# Altium PCB VESC_POWER_91mm.PcbDoc
Units mm, origin at the board's own origin, x right, y up, seen from the top; angles counter-clockwise.
Board outline 92 x 60 mm, 4 copper layers (Top Layer, Layer 1, Layer 2, Bottom Layer), stack 1.622 mm thick; 65 components, 20 nets, 166 pads, 1340 vias.
Unrouted connection lines stored in the file: 69.
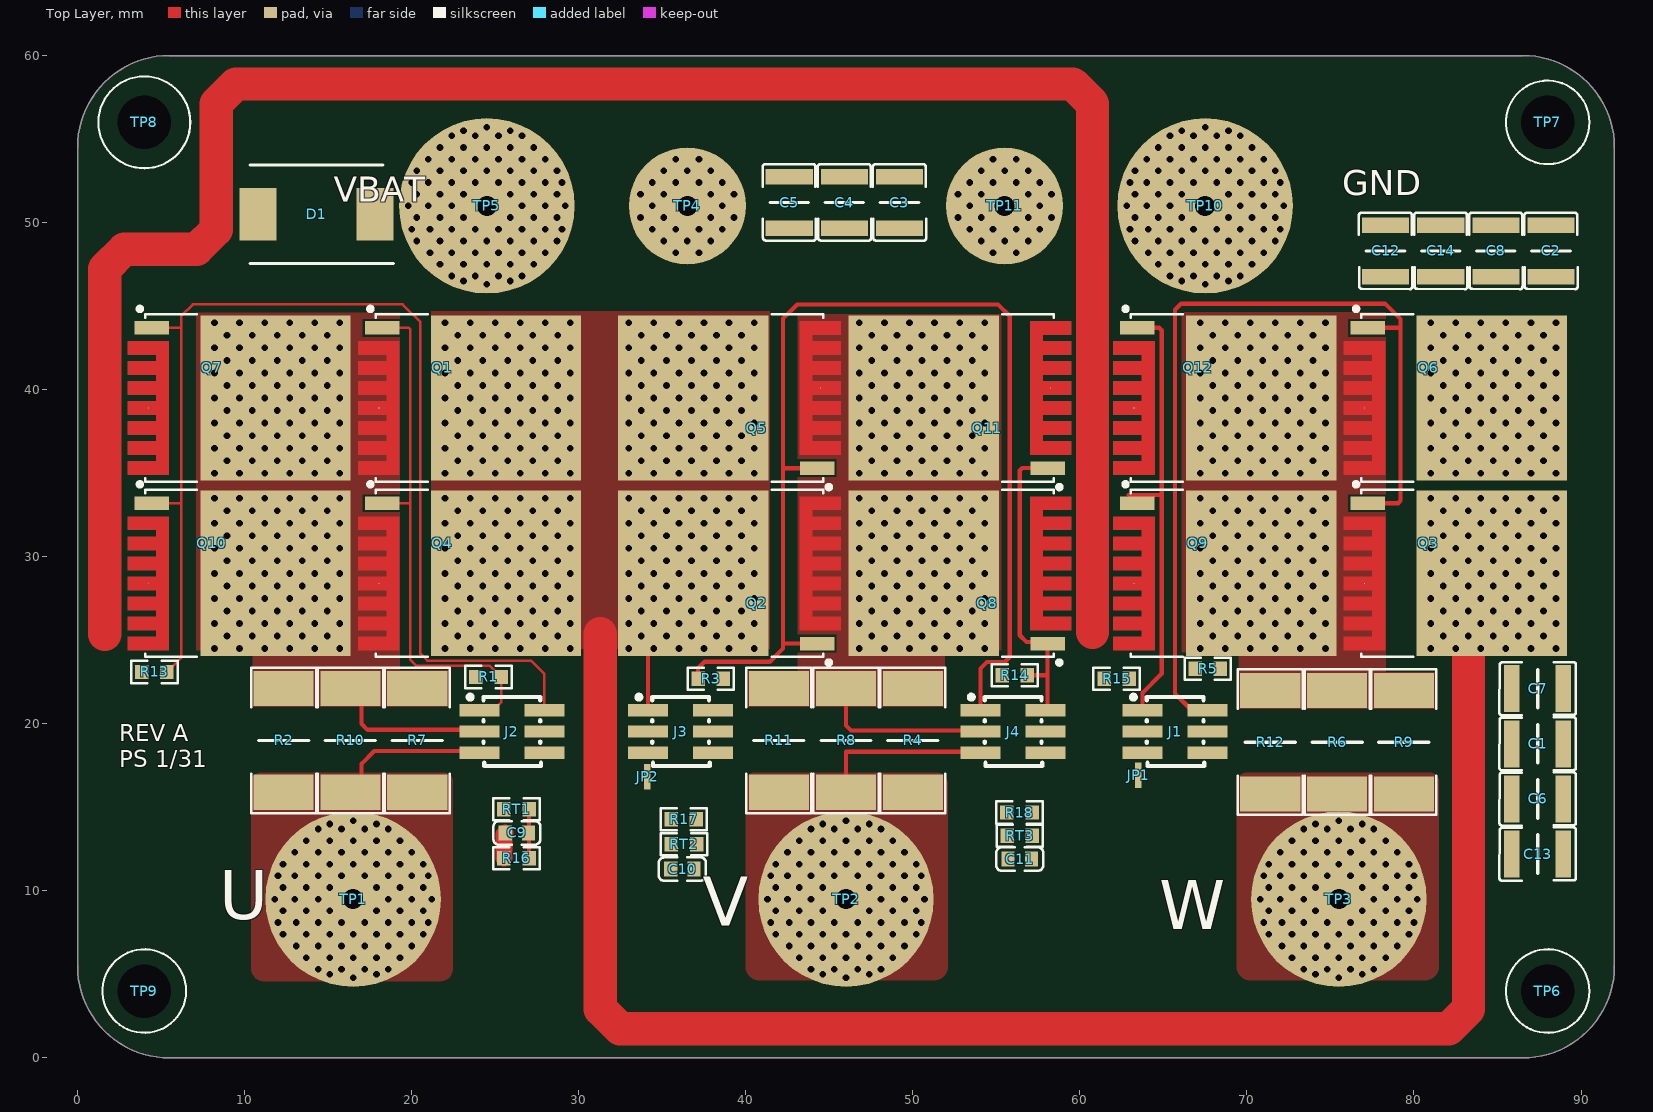
[diagram p0: Top Layer view]
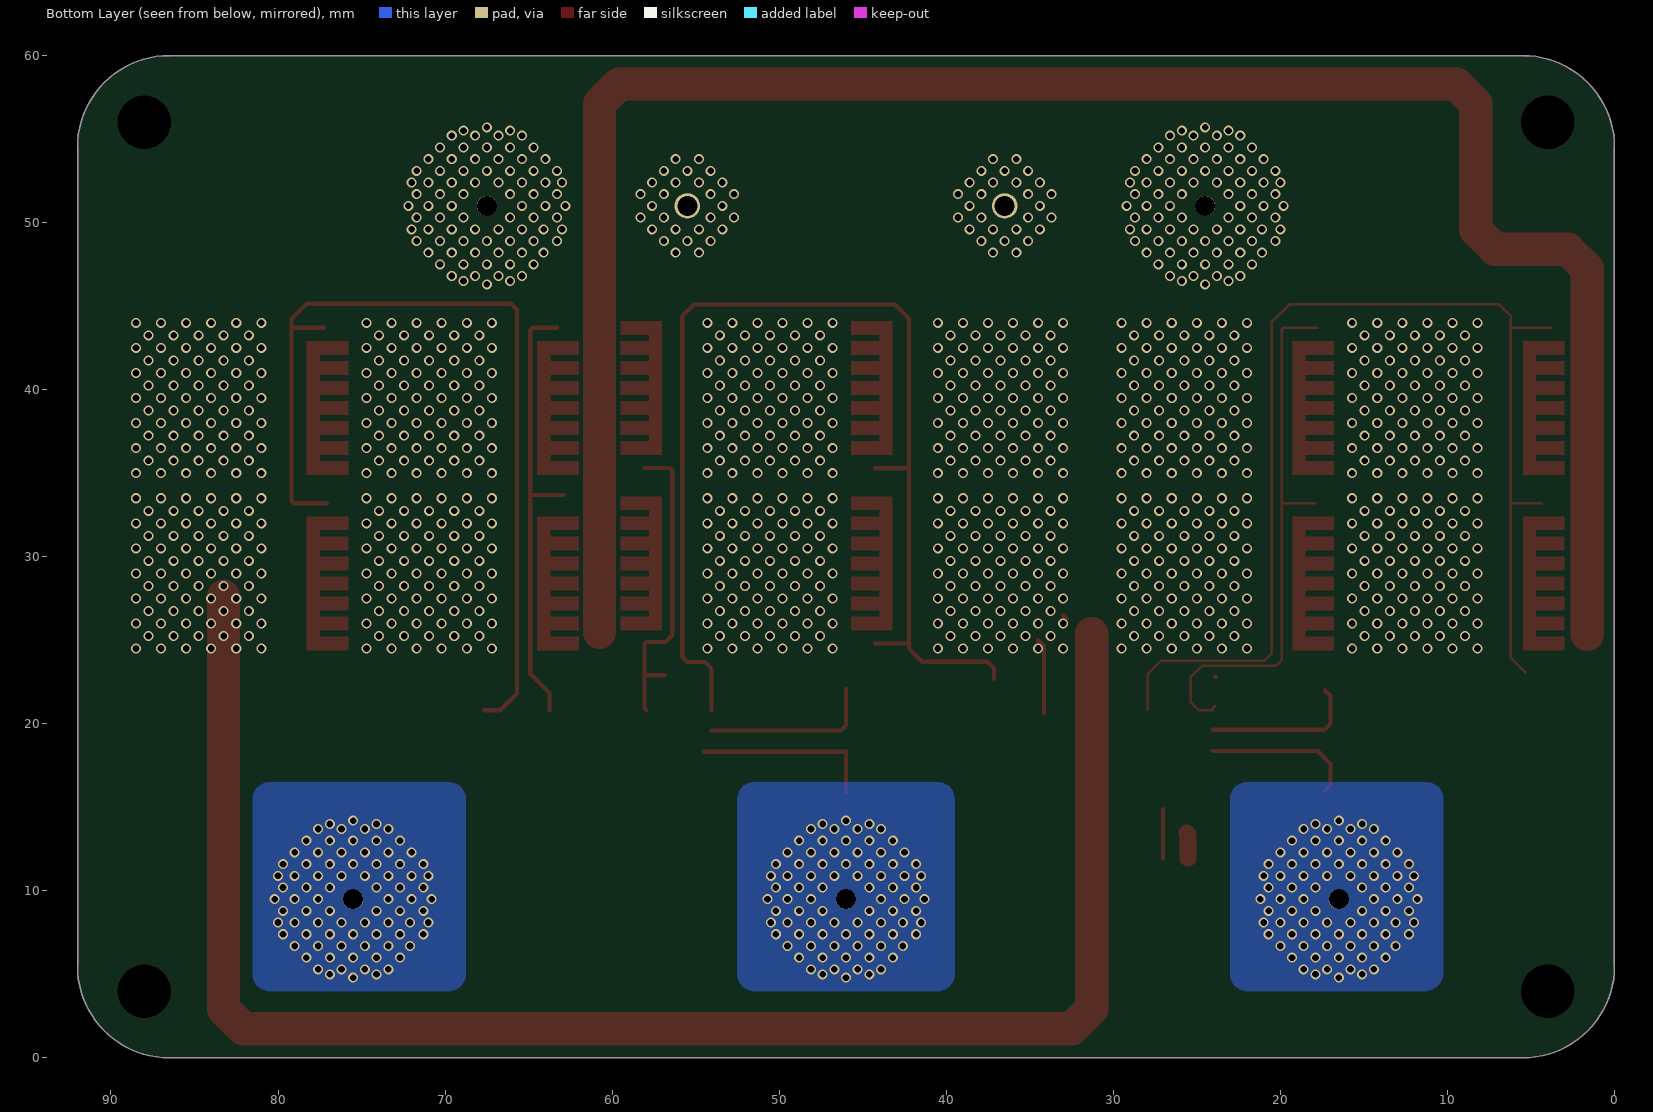
[diagram p1: Bottom Layer view, seen from below]
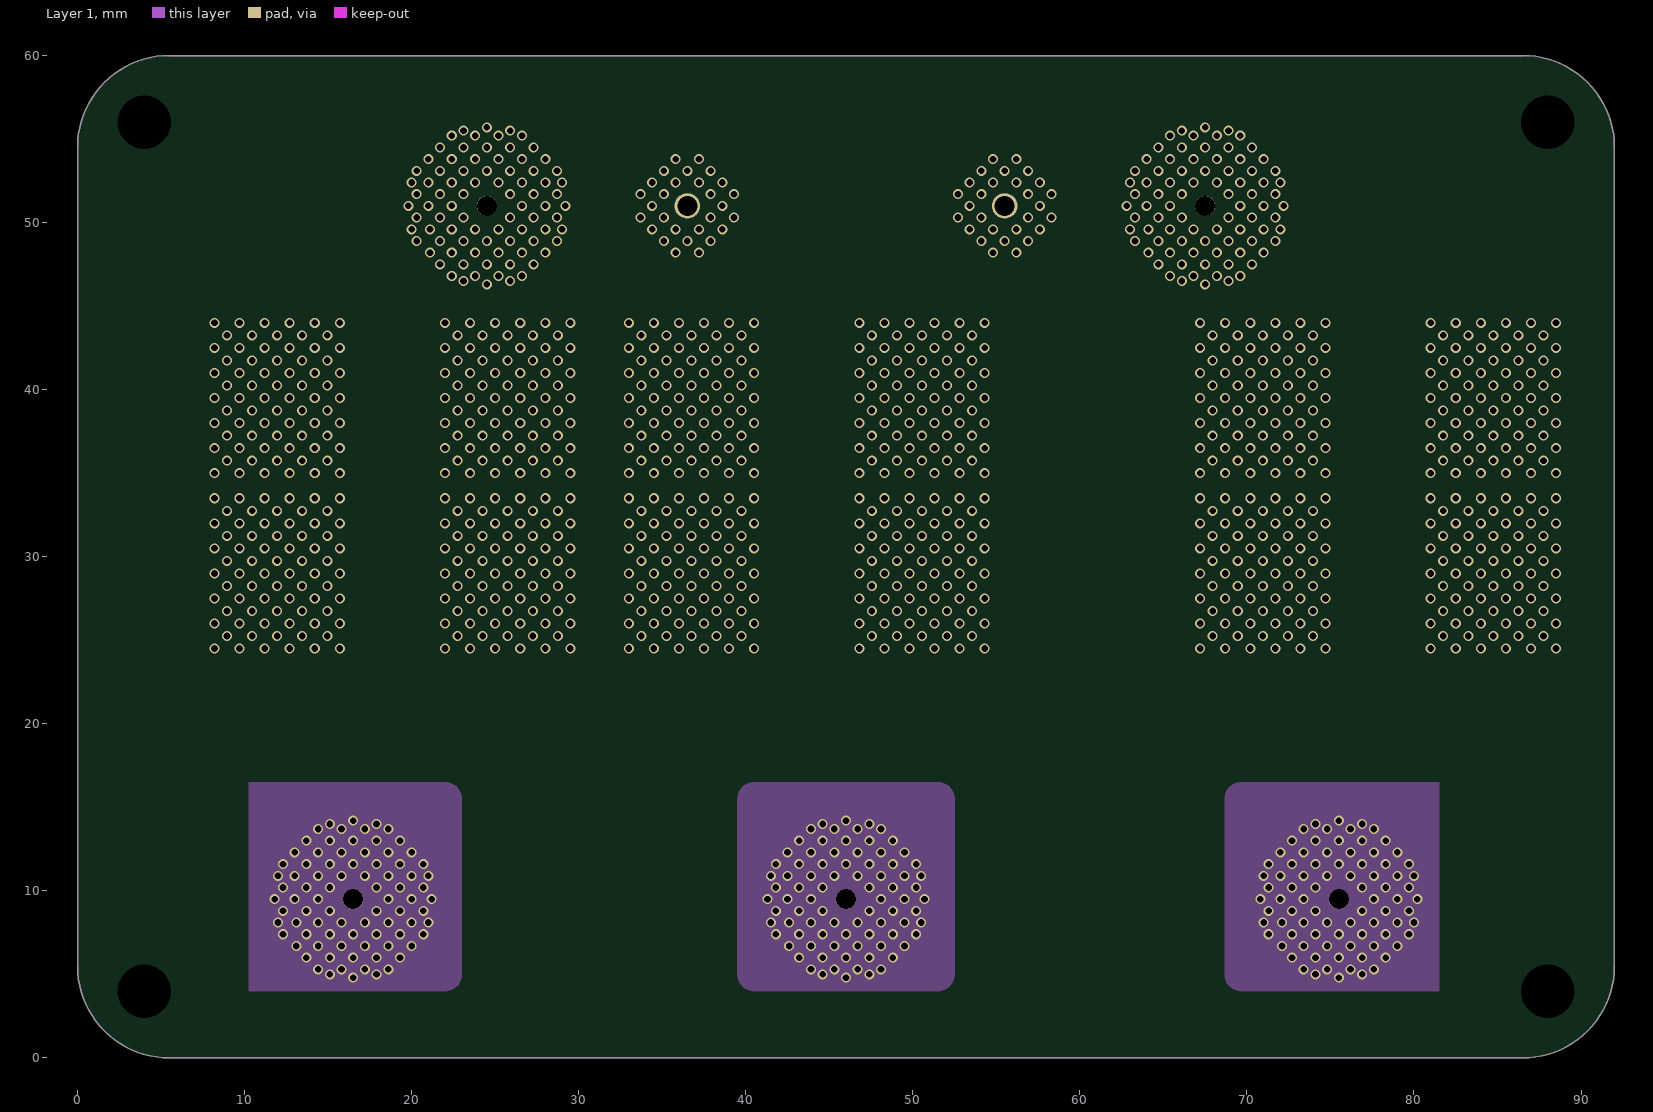
[diagram p2: Layer 1]
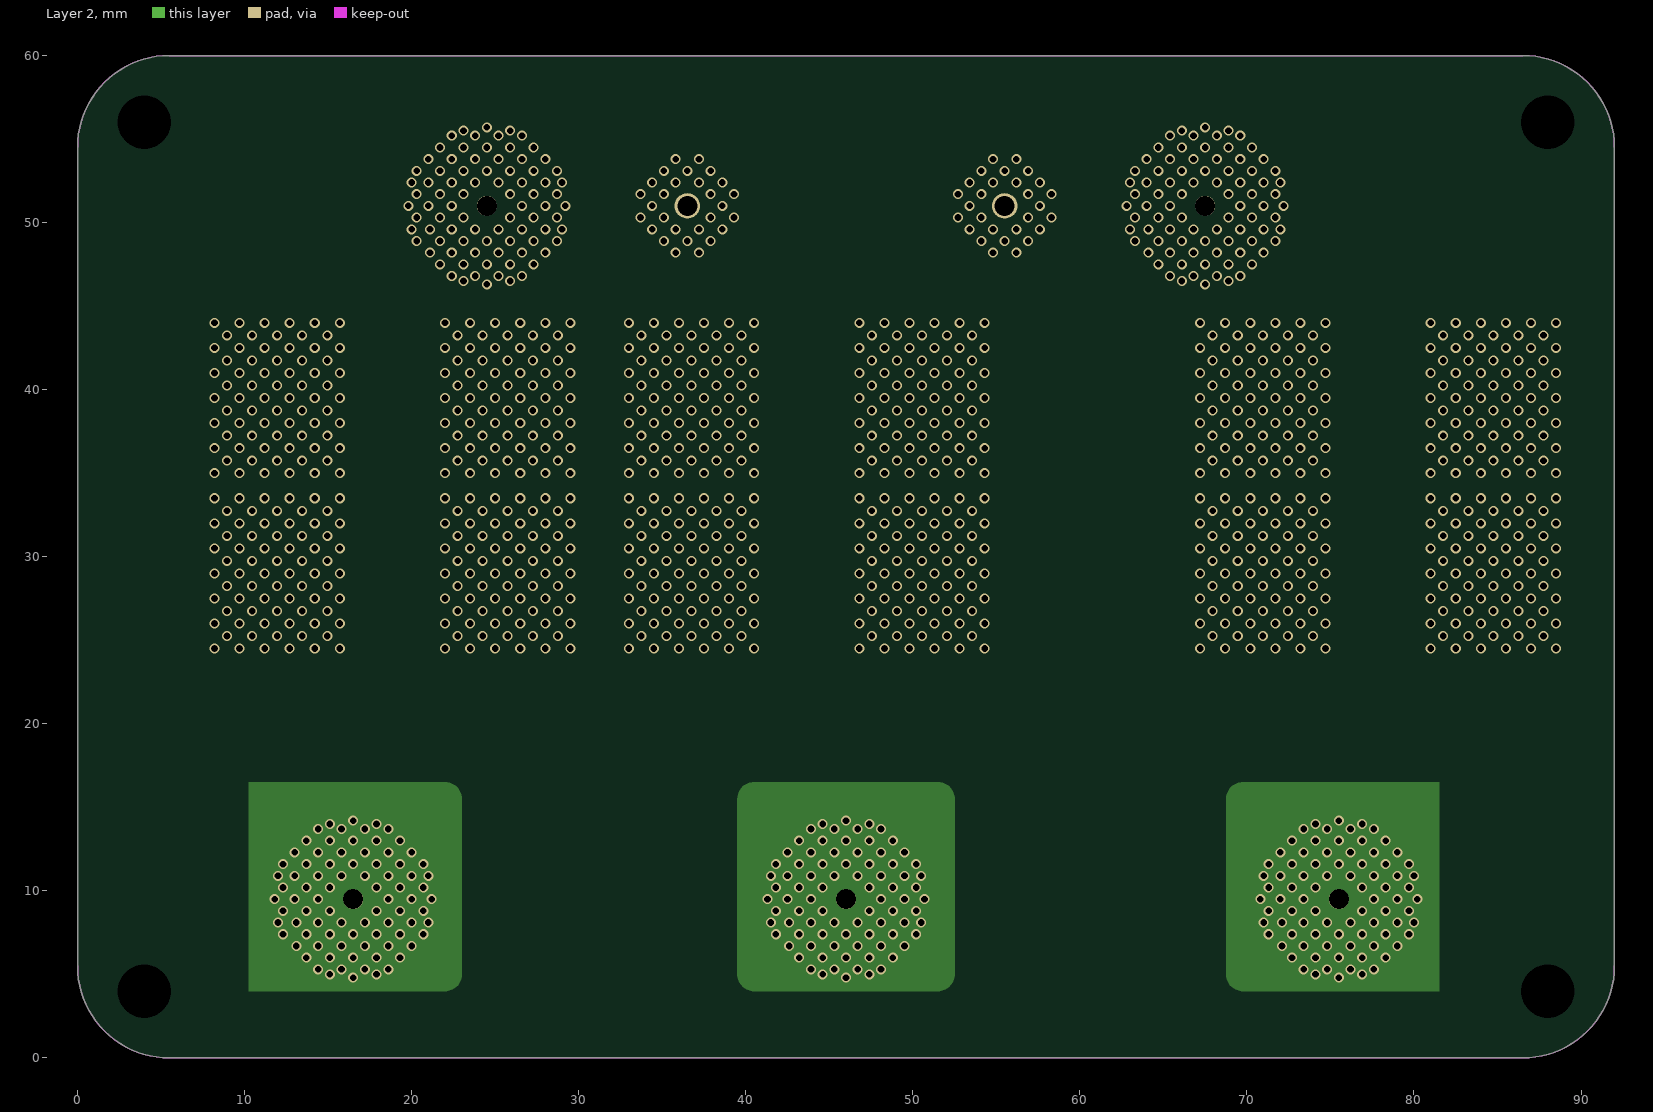
[diagram p3: Layer 2]

## Layer stack, top to bottom
Top Solder: solder mask 0.0102, Solder Resist, Dk 3.5
Top Layer: signal copper 0.035
Dielectric 2: prepreg 0.2083, PP-022, Dk 4.5
Layer 1: signal copper 0.0175
Dielectric 1: core 1.1, Core-024, Dk 4.6
Layer 2: signal copper 0.0175
Dielectric 3: prepreg 0.2083, PP-022, Dk 4.5
Bottom Layer: signal copper 0.035
Bottom Solder: solder mask 0.0102, Solder Resist, Dk 3.5

## Board outline
0,5.5 ccw(c5.5,5.5) 5.5,0 86.5,0 ccw(c86.5,5.5) 92,5.5 92,54.5 ccw(c86.5,54.5) 86.5,60 5.5,60 ccw(c5.5,54.5) 0,54.5

## Design rules (kind name [scope] priority, off if disabled: settings)
BoardOutlineClearance [All] p1: gap=0.254 ignorepadtopadclearanceinfootprint=FALSE except(0: Arc-SplitContinuation Track-SplitContinuation SMDPad-SplitContinuation THPad-SplitContinuation Via-SplitContinuation Fill-SplitContinuation Poly-SplitContinuation Region-SplitContinuation Text-SplitContinuation)
Clearance [All] p1: gap=0.152 ignorepadtopadclearanceinfootprint=FALSE
HoleSize [All] p1: absolutevalues=TRUE maxlimit=5 minlimit=0.025 maxpercent=80.000 minpercent=20.000
HoleToHoleClearance [All] p1: gap=0.229 allowstackedmicrovias=TRUE
MinimumSolderMaskSliver [All] p1: minsoldermaskwidth=0.051
PolygonConnect [All] p1: connectstyle=Direct reliefconductorwidth=0.254 reliefentries=4 polygonreliefangle="90 Angle" airgapwidth=0.254
RoutingVias [All] p1: holewidth=0.711 width=1.27 viastyle="Through Hole" minholewidth=0.711 minwidth=1.27 maxholewidth=0.711 maxwidth=1.27
SilkToSilkClearance [All] p1: silktosilkclearance=0
SilkToSolderMaskClearance [IsPad] p1: minsilkscreentomaskgap=0.025 clearancetoexposedcopper=TRUE
SolderMaskExpansion [All] p1: expansion=0.102 istentingtop=FALSE
Width [All] p1: maxlimit=2.54 minlimit=0.152 preferedwidth=0.254
25 further rules are at their usual default settings.

## Components (designator, comment, footprint, x,y, rotation, side; value= is the part's Value field where it differs from the comment)
C1 "2.2uF/100V" CAPC3225X230N 87.4,18.8 r180 top
C2 "2.2uF/100V" CAPC3225X230N 88.2,48.3 r270 top
C3 "2.2uF/100V" CAPC3225X230N 49.2,51.2 r270 top
C4 "2.2uF/100V" CAPC3225X230N 45.9,51.2 r270 top
C5 "2.2uF/100V" CAPC3225X230N 42.6,51.2 r270 top
C6 "2.2uF/100V" CAPC3225X230N 87.4,15.5 r180 top
C7 "2.2uF/100V" CAPC3225X230N 87.4,22.1 r180 top
C8 "2.2uF/100V" CAPC3225X230N 84.9,48.3 r270 top
C9 "2.2uF/6.3V" C0603 26.296,13.464 r180 top
C10 "2.2uF/6.3V" C0603 36.2,11.3 r180 top
C11 "2.2uF/6.3V" C0603 56.4,11.9 r180 top
C12 "2.2uF/100V" CAPC3225X230N 78.3,48.3 r270 top
C13 "2.2uF/100V" CAPC3225X230N 87.4,12.2 r180 top
C14 "2.2uF/100V" CAPC3225X230N 81.6,48.3 r270 top
D1 "SMCJ75A" DIOM7959X262N 14.3,50.5 r180 top
J1 "PZ127-2-03-S" HDR-SMD_6P-P1.27-V-M-R2-C3-LS5.3 65.7,19.535 r270 top
J2 "PZ127-2-03-S" HDR-SMD_6P-P1.27-V-M-R2-C3-LS5.3 26,19.535 r270 top
J3 "PZ127-2-03-S" HDR-SMD_6P-P1.27-V-M-R2-C3-LS5.3 36.1,19.535 r270 top
J4 "PZ127-2-03-S" HDR-SMD_6P-P1.27-V-M-R2-C3-LS5.3 56,19.535 r270 top
JP1 "Short" SHORT 63.5,16.922 r90 top
JP2 "Short" SHORT 34.1,16.822 r90 top
Q1 "NCEP023N10LL" TOLL 23.5,39.5 r0 top
Q2 "NCEP023N10LL" TOLL 39,29 r180 top
Q3 "NCEP023N10LL" TOLL 82.5,29 r0 top
Q4 "NCEP023N10LL" TOLL 23.5,29 r0 top
Q5 "NCEP023N10LL" TOLL 39,39.5 r180 top
Q6 "NCEP023N10LL" TOLL 82.5,39.5 r0 top
Q7 "NCEP023N10LL" TOLL 9.7,39.5 r0 top
Q8 "NCEP023N10LL" TOLL 52.8,29 r180 top
Q9 "NCEP023N10LL" TOLL 68.7,29 r0 top
Q10 "NCEP023N10LL" TOLL 9.7,29 r0 top
Q11 "NCEP023N10LL" TOLL 52.8,39.5 r180 top
Q12 "NCEP023N10LL" TOLL 68.7,39.5 r0 top
R1 "5.1K/1%" R0603 24.6,22.8 r0 top
R2 "1mR/1%" R2512 12.336,19 r90 top
R3 "5.1K/1%" R0603 37.9,22.7 r180 top
R4 "1mR/1%" R2512 50,19 r90 top
R5 "5.1K/1%" R0603 67.65,23.3 r180 top
R6 "1mR/1%" R2512 75.396,18.9 r90 top
R7 "1mR/1%" R2512 20.336,19 r90 top
R8 "1mR/1%" R2512 46,19 r90 top
R9 "1mR/1%" R2512 79.396,18.9 r90 top
R10 "1mR/1%" R2512 16.336,19 r90 top
R11 "1mR/1%" R2512 41.984,19 r90 top
R12 "1mR/1%" R2512 71.396,18.9 r90 top
R13 "5.1K/1%" R0603 4.6,23.1 r0 top
R14 "5.1K/1%" R0603 56.1,22.9 r0 top
R15 "5.1K/1%" R0603 62.2,22.7 r0 top
R16 "10K/1%" R0603 26.276,11.949 r0 top
R17 "10K/1%" R0603 36.283,14.288 r0 top
R18 "10K/1%" R0603 56.383,14.688 r0 top
RT1 "NTC" R0603 26.276,14.894 r0 top
RT2 "NTC" R0603 36.3,12.8 r0 top
RT3 "NTC" R0603 56.4,13.3 r0 top
TP1 "PHA" TP_11X11 16.5,9.5 r0 top
TP2 "PHB" TP_11X11 46,9.5 r0 top
TP3 "PHC" TP_11X11 75.5,9.5 r0 top
TP4 "GND" TP_7X7 36.5,51 r0 top
TP5 "GND" TP_11X11 24.5,51 r0 top
TP6 "TEST POINT" HOLE-3.2MM_M 88,4 r0 top
TP7 "TEST POINT" HOLE-3.2MM_M 88,56 r0 top
TP8 "TEST POINT" HOLE-3.2MM_M 4,56 r0 top
TP9 "TEST POINT" HOLE-3.2MM_M 4,4 r0 top
TP10 "VIN" TP_11X11 67.5,51 r0 top
TP11 "VIN" TP_7X7 55.5,51 r0 top

## Footprints (in the part's own frame and the unit in brackets; to place one, negate y for a bottom-side part, rotate by r counter-clockwise, add the part's x,y. Pads: shape width x height; smd on the part's side, far side on the other; paste and mask are expansions set on the pad)
C0603 [mm] "C0603"
  rect 0.8x0.9 smd: 1(-0.7,0) 2(0.7,0)
  silkscreen extent -1.41,-0.7 1.4,0.7, body extent -0.8,-0.41 0.8,0.41, height 0.9
CAPC3225X230N [mm]
  rect 0.92x2.82 smd: 1(-1.54,0) 2(1.54,0)
  silkscreen extent -2.3,-1.6 2.28,1.6, body extent -1.6,-1.25 1.6,1.25, height 2.47
DIOM7959X262N [mm]
  rect 2.2x3.15 smd: 1(-3.5,0) 2(3.5,0)
  silkscreen extent -4.6,-2.95 3.97,2.95, body extent -3.97,-2.95 3.97,2.95, height 2.31
HDR-SMD_6P-P1.27-V-M-R2-C3-LS5.3 [mm]
  rect 0.74x2.4 smd paste+0 mask+0.05: 1(-1.27,-1.95) 2(-1.27,1.95) 3(0,-1.95) 4(0,1.95) 5(1.27,-1.95) 6(1.27,1.95)
  silkscreen extent -2.2,-2.64 2.06,1.75
HOLE-3.2MM_M [mm]
  round 0 hole 3.2 unplated: 1(0,0)
  silkscreen extent -2.5,-2.5 2.5,2.5
R0603 [mm] "R0603"
  rect 0.806x0.864 smd: 1(-0.753,0) 2(0.753,0)
  silkscreen extent -1.38,-0.66 1.39,0.66, body extent -0.79,-0.43 0.79,0.43, height 0.5
R2512 [mm]
  rect 2.1x3.6 smd: 1(-3.1,0) 2(3.1,0)
  silkscreen extent -4.35,-1.95 4.35,1.95, body extent -3.2,-1.6 3.2,1.6, height 0.8
SHORT [mil] "SHORT"
  rect 30x15 smd paste-99999 mask+0: 1(-14.9,0) 2(14.9,0)
TOLL [mm] "TOLL"
  rect 2.063x0.8 smd: 1(-5.269,4.2)
  rect 9x9.9 smd: 2(2.15,0)
  oct 0.025x0.025 smd: 3(-5.46,-0.6)
  round 0.025 smd: 3(-5.46,-0.6)
  Top Layer region: -6.691,3.4 -4.228,3.4 -4.228,-4.6 -6.691,-4.6 -6.691,-3.8 -4.991,-3.8 -4.991,-3.4 -6.691,-3.4 -6.691,-2.6 -4.991,-2.6 -4.991,-2.2 -6.691,-2.2 -6.691,-1.4 -4.991,-1.4 -4.991,-1 -6.691,-1 -6.691,-0.2 -4.991,-0.2 -4.991,0.2 -6.691,0.2 -6.691,1 -4.991,1 -4.991,1.4 -6.691,1.4 -6.691,2.2 -4.991,2.2 -4.991,2.6 -6.691,2.6
  silkscreen extent -6.1,-5 -2.55,5.46, body extent -6.04,-4.95 5.63,4.95, height 2.3
TP_7X7 [mm] "TP_7X7"
  round 7 smd: 1(0,0)
  round 1.524 hole 1.2: 1(0,0)
  body extent -3.35,-3.35 3.34,3.35, height 6
TP_11X11 [mm] "TP_8X8"
  round 10.5 smd: 1(0,0)
  round 1.2 hole 1.2: 1(0,0)
  body extent -5,-5 4.99,5, height 26.4

## Part data
C1 C2 C3 C4 C5 C6 C7 C8 C9 C10 C11 C12 C13 C14: library part "CAP NP"
  C1 C2 C3 C4 C5 C6 C7 C8 C12 C13 C14: PCB Footprint=C1206
  C9 C10 C11: PCB Footprint=C0603
D1: "TVS Diode (Uni-directional)", Manufacturer_Name=Bourns, Mouser Part Number=652-SMCJ75A, Arrow Part Number=SMCJ75A, Arrow Price/Stock=https://www.arrow.com/en/products/smcj75a/bourns?region=nac, Datasheet Link=https://www.bourns.com/docs/Product-Datasheets/SMCJ.pdf, Height=2.62mm, Manufacturer_Part_Number=SMCJ75A, Mouser Price/Stock=https://www.mouser.co.uk/ProductDetail/Bourns/SMCJ75A?qs=%252Bf8Cd6aE5bzxrdYbQ%252Bf9mA%3D%3D
J1 J2 J3 J4: Color=黑色, Current Rating (Max)=1A, JLCPCB Part Class="Extended Part", LCSC Part Name="2x3P 间距:1.27mm 方针 立贴", Manufacturer=HCTL(华灿天禄), Operating Temperature Range=-40℃~+105℃, Soldering Temperature(Max)=260℃@10S, Add into BOM=yes, Circluar Pins/Square Pins=方针, Contact Material=黄铜, Convert to PCB=yes, Datasheet=https://atta.szlcsc.com/upload/public/pdf/source/20230609/2ACB07ADC7D4DAF6D292F3D23C037F6C.pdf, Device=PZ127-2-03-S, Insulation Height=1.5mm, Length of End Connection Pin=-, Length of Mating Pin=4mm, Manufacturer Part=PZ127-2-03-S, Mounting Type=立贴, Number of Pins=6P, Number of Rows=双排, Pin Structure=2x3P, Pitch=1.27mm, Row Spacing=1.27mm, Supplier=LCSC, Supplier Footprint=SMD,P=1.27mm, Supplier Part=C3975186, Symbol=PZ127-2-03-S
JP1 JP2: library part SHORT, "2 PIN SHORTED TO CONNECT DIFFERENT NETS", CLASS=DISCRETE, PART_NUMBER=TMP-442
Q1 Q2 Q3 Q4 Q5 Q6 Q7 Q8 Q9 Q10 Q11 Q12: library part "MOSFET N", PCB Footprint=TOLL
R1 R2 R3 R4 R5 R6 R7 R8 R9 R10 R11 R12 R13 R14 R15 R16 R17 R18: library part RESISTOR
  R1 R3 R5 R13 R14 R15 R16 R17 R18: PCB Footprint=R0603
  R2 R4 R6 R7 R8 R9 R10 R11 R12: PCB Footprint=R3920
TP1 TP2 TP3 TP4 TP5 TP10 TP11: library part "TEST POINT", PCB Footprint=TP_8x8
RT1 RT2 RT3: PCB Footprint=R0603

## Via types
v1: diameter 0.6, hole 0.4, Top Layer to Bottom Layer, tented both sides, 1340 vias

## Nets (pads, with @x,y where several pads share a name; then routed paths per layer and width w, separated by ;. In a path a pad name is that pad's centre, name@x,y a point inside that pad or via, vN(x,y) a via of type N, cw(c..) or ccw(c..) an arc to the next point about the centre after c; other vN are vias at no path point)
3V3: J2.6 J3.6 J4.6 RT1.1 RT2.1 RT3.1
ADC_TEMP: C9.1 J2.4 R16.2 RT1.2 | length 2.9
  Top Layer w0.254: R16.2 RT1.2
ADC_TEMP2: C10.1 J3.4 R17.2 RT2.2
ADC_TEMP3: C11.1 J4.4 R18.2 RT3.2
GHA: J2.1 Q1.1 Q4.1 R1.2 | length 33.1
  Top Layer w0.152: Q1.1@17.782,43.7 19.834,43.7 19.923,43.611 19.923,33.2 ; Q4.1@17.897,33.2 19.923,33.2 ; J2.1@23.912,21.043 J2.1@24.05,20.905 ; J2.1 24.88,20.805 25.353,21.278 25.353,22.829 25.026,23.156 24.997,23.156 24.687,23.466 20.278,23.466 19.923,23.821 19.923,33.2
GHB: J4.1 Q2.1 Q5.1 R3.2 | length 69.2
  Top Layer w0.254: R3.2 37.147,23.324 37.532,23.709 41.443,23.709 42.234,24.5 42.234,24.8 ; Q2.1 42.234,24.8 ; Q5.1 42.234,35.3 ; J4.1 54.05,23.299 54.442,23.691 55.499,23.691 55.8,23.992 55.8,44.4 55.1,45.1 43.08,45.1 42.234,44.254 42.234,35.3 ; 42.234,24.8 42.234,35.3
GHC: J1.2 Q3.1 Q6.1 R5.2 | length 54.4
  Top Layer w0.254: J1.2 66.695,20.805 65.7,21.8 65.7,44.78 66.069,45.149 78.27,45.149 79.2,44.219 79.2,43.7 ; Q3.1@77.067,33.2 79.051,33.2 79.2,33.349 79.2,43.7 ; Q6.1 79.2,43.7
GLA: J2.2 Q7.1 Q10.1 R13.2 | length 70.9
  Top Layer w0.152: Q7.1@3.792,43.7 6.2,43.7 ; Q10.1@4.343,33.2 6.2,33.2 ; R13.2 6.2,23.947 6.2,33.2 ; J2.2@27.95,20.87 27.95,22.977 27.145,23.782 20.933,23.782 20.518,24.197 20.518,44.047 19.465,45.1 6.9,45.1 6.2,44.4 6.2,43.7 ; 6.2,33.2 6.2,43.7
GLB: J4.2 Q8.1 Q11.1 R14.2 | length 18.7
  Top Layer w0.254: R14.2 58.069,22.9 ; J4.2 58.069,20.924 58.069,22.9 ; Q11.1@58.065,35.304 56.553,35.304 56.404,35.155 56.404,25.296 56.805,24.895 57.974,24.895 Q8.1 58.069,22.9
GLC: J1.1 Q9.1 Q12.1 R15.2 | length 26.9
  Top Layer w0.254: 62.909,33.7 64.9,33.7 ; Q12.1@63.3,43.7 64.751,43.7 64.9,43.551 64.9,33.7 ; J1.1 63.75,21.85 64.9,23 64.9,33.7
GND: C1.1 C2.1 C3.1 C4.1 C5.1 C6.1 C7.1 C8.1 C9.2 C10.2 C11.2 C12.1 C13.1 C14.1 D1.2 J3.2 JP1.1 JP2.1 Q7.3 Q8.3 Q9.3 Q10.3 Q11.3 Q12.3 R13.1 R14.1 R15.1 R16.1 R17.1 R18.1 TP10.1 TP11.1 | length 123.7
  Top Layer w1: R16.1 25.523,13.391 C9.2
  Top Layer w2: 1.619,25.346 1.619,47.228 2.791,48.4 7.128,48.4 8.3,49.572 8.3,57.126 9.472,58.297 59.583,58.297 60.755,57.126 60.755,25.468
  other v1: 67.5,46.3 66.1,46.5 68.9,46.5 65.4,46.8 66.8,46.8 68.2,46.8 69.6,46.8 64.7,47.5 66.1,47.5 67.5,47.5 68.9,47.5 70.3,47.5 54.8,48.2 56.2,48.2 64.1,48.2 65.4,48.2 66.8,48.2 68.2,48.2 69.6,48.2 71,48.2 54.1,48.9 55.5,48.9 56.9,48.9 63.3,48.9 64.7,48.9 66.1,48.9 67.5,48.9 68.9,48.9 70.3,48.9 71.7,48.9 53.4,49.6 54.8,49.6 56.2,49.6 57.6,49.6 63,49.6 64.1,49.6 65.4,49.6 66.8,49.6 68.2,49.6 69.6,49.6 71,49.6 72,49.6 52.7,50.3 54.1,50.3 56.9,50.3 58.3,50.3 63.3,50.3 64.7,50.3 66.1,50.3 68.9,50.3 70.3,50.3 71.7,50.3 53.4,51 57.6,51 62.8,51 64,51 65.4,51 69.6,51 71,51 72.2,51 52.7,51.7 54.1,51.7 56.9,51.7 58.3,51.7 63.3,51.7 64.7,51.7 66.1,51.7 68.9,51.7 70.3,51.7 71.7,51.7 53.4,52.4 54.8,52.4 56.2,52.4 57.6,52.4 63,52.4 64,52.4 65.4,52.4 66.8,52.4 68.2,52.4 69.6,52.4 71,52.4 72,52.4 54.1,53.1 55.5,53.1 56.9,53.1 63.3,53.1 64.7,53.1 66.1,53.1 67.5,53.1 68.9,53.1 70.3,53.1 71.7,53.1 54.8,53.8 56.2,53.8 64,53.8 65.4,53.8 66.8,53.8 68.2,53.8 69.6,53.8 71,53.8 64.7,54.5 66.1,54.5 67.5,54.5 68.9,54.5 70.3,54.5 65.4,55.2 66.8,55.2 68.2,55.2 69.6,55.2 66.1,55.5 68.9,55.5 67.5,55.7
NetJ1_3: J1.3 J1.5 JP1.2
NetJ3_3: J3.3 J3.5 JP2.2
PHA: J2.5 R2.1 R7.1 R10.1 TP1.1 | length 9.1
  Top Layer w0.254: R10.1@17.324,16 17,16.324 17,17.6 17.765,18.365 J2.5@24.05,18.365
  other v1: 16.5,4.8 15.1,5 17.9,5 14.4,5.3 15.8,5.3 17.2,5.3 18.6,5.3 13.7,6 15.1,6 16.5,6 17.9,6 19.3,6 13.1,6.7 14.4,6.7 15.8,6.7 17.2,6.7 18.6,6.7 20,6.7 12.3,7.4 13.7,7.4 15.1,7.4 16.5,7.4 17.9,7.4 19.3,7.4 20.7,7.4 12,8.1 13.1,8.1 14.4,8.1 15.8,8.1 17.2,8.1 18.6,8.1 20,8.1 21,8.1 12.3,8.8 13.7,8.8 15.1,8.8 17.9,8.8 19.3,8.8 20.7,8.8 11.8,9.5 13,9.5 14.4,9.5 18.6,9.5 20,9.5 21.2,9.5 12.3,10.2 13.7,10.2 15.1,10.2 17.9,10.2 19.3,10.2 20.7,10.2 12,10.9 13,10.9 14.4,10.9 15.8,10.9 17.2,10.9 18.6,10.9 20,10.9 21,10.9 12.3,11.6 13.7,11.6 15.1,11.6 16.5,11.6 17.9,11.6 19.3,11.6 20.7,11.6 13,12.3 14.4,12.3 15.8,12.3 17.2,12.3 18.6,12.3 20,12.3 13.7,13 15.1,13 16.5,13 17.9,13 19.3,13 14.4,13.7 15.8,13.7 17.2,13.7 18.6,13.7 15.1,14 17.9,14 16.5,14.2
PHB: J4.5 R4.1 R8.1 R11.1 TP2.1 | length 10.9
  Top Layer w0.254: R8.1 46,18.33 J4.5@54.511,18.33
  other v1: 46,4.8 44.6,5 47.4,5 43.9,5.3 45.3,5.3 46.7,5.3 48.1,5.3 43.2,6 44.6,6 46,6 47.4,6 48.8,6 42.6,6.7 43.9,6.7 45.3,6.7 46.7,6.7 48.1,6.7 49.5,6.7 41.8,7.4 43.2,7.4 44.6,7.4 46,7.4 47.4,7.4 48.8,7.4 50.2,7.4 41.5,8.1 42.6,8.1 43.9,8.1 45.3,8.1 46.7,8.1 48.1,8.1 49.5,8.1 50.5,8.1 41.8,8.8 43.2,8.8 44.6,8.8 47.4,8.8 48.8,8.8 50.2,8.8 41.3,9.5 42.5,9.5 43.9,9.5 48.1,9.5 49.5,9.5 50.7,9.5 41.8,10.2 43.2,10.2 44.6,10.2 47.4,10.2 48.8,10.2 50.2,10.2 41.5,10.9 42.5,10.9 43.9,10.9 45.3,10.9 46.7,10.9 48.1,10.9 49.5,10.9 50.5,10.9 41.8,11.6 43.2,11.6 44.6,11.6 46,11.6 47.4,11.6 48.8,11.6 50.2,11.6 42.5,12.3 43.9,12.3 45.3,12.3 46.7,12.3 48.1,12.3 49.5,12.3 43.2,13 44.6,13 46,13 47.4,13 48.8,13 43.9,13.7 45.3,13.7 46.7,13.7 48.1,13.7 44.6,14 47.4,14 46,14.2
PHC: J1.6 R6.1 R9.1 R12.1 TP3.1
  other v1: 75.5,4.8 74.1,5 76.9,5 73.4,5.3 74.8,5.3 76.2,5.3 77.6,5.3 72.7,6 74.1,6 75.5,6 76.9,6 78.3,6 72.1,6.7 73.4,6.7 74.8,6.7 76.2,6.7 77.6,6.7 79,6.7 71.3,7.4 72.7,7.4 74.1,7.4 75.5,7.4 76.9,7.4 78.3,7.4 79.7,7.4 71,8.1 72.1,8.1 73.4,8.1 74.8,8.1 76.2,8.1 77.6,8.1 79,8.1 80,8.1 71.3,8.8 72.7,8.8 74.1,8.8 76.9,8.8 78.3,8.8 79.7,8.8 70.8,9.5 72,9.5 73.4,9.5 77.6,9.5 79,9.5 80.2,9.5 71.3,10.2 72.7,10.2 74.1,10.2 76.9,10.2 78.3,10.2 79.7,10.2 71,10.9 72,10.9 73.4,10.9 74.8,10.9 76.2,10.9 77.6,10.9 79,10.9 80,10.9 71.3,11.6 72.7,11.6 74.1,11.6 75.5,11.6 76.9,11.6 78.3,11.6 79.7,11.6 72,12.3 73.4,12.3 74.8,12.3 76.2,12.3 77.6,12.3 79,12.3 72.7,13 74.1,13 75.5,13 76.9,13 78.3,13 73.4,13.7 74.8,13.7 76.2,13.7 77.6,13.7 74.1,14 76.9,14 75.5,14.2
SHA: J2.3 Q1.3 Q4.3 Q7.2 Q10.2 R1.1 R2.2 R7.2 R10.2 | length 9.4
  Top Layer w0.254: R10.2@17.324,22 17,21.676 17,20 17.365,19.635 24.05,19.635 J2.3@24.052,19.637 ; R1.1 R1.1@23.894,22.8
  other v1: 8.2,24.5 9.7,24.5 11.2,24.5 12.7,24.5 14.2,24.5 15.7,24.5 8.95,25.25 10.45,25.25 11.95,25.25 13.45,25.25 14.95,25.25 8.2,26 9.7,26 11.2,26 12.7,26 14.2,26 15.7,26 8.95,26.75 10.45,26.75 11.95,26.75 13.45,26.75 14.95,26.75 8.2,27.5 9.7,27.5 11.2,27.5 12.7,27.5 14.2,27.5 15.7,27.5 8.95,28.25 10.45,28.25 11.95,28.25 13.45,28.25 14.95,28.25 8.2,29 9.7,29 11.2,29 12.7,29 14.2,29 15.7,29 8.95,29.75 10.45,29.75 11.95,29.75 13.45,29.75 14.95,29.75 8.2,30.5 9.7,30.5 11.2,30.5 12.7,30.5 14.2,30.5 15.7,30.5 8.95,31.25 10.45,31.25 11.95,31.25 13.45,31.25 14.95,31.25 8.2,32 9.7,32 11.2,32 12.7,32 14.2,32 15.7,32 8.95,32.75 10.45,32.75 11.95,32.75 13.45,32.75 14.95,32.75 8.2,33.5 9.7,33.5 11.2,33.5 12.7,33.5 14.2,33.5 15.7,33.5 8.2,35 9.7,35 11.2,35 12.7,35 14.2,35 15.7,35 8.95,35.75 10.45,35.75 11.95,35.75 13.45,35.75 14.95,35.75 8.2,36.5 9.7,36.5 11.2,36.5 12.7,36.5 14.2,36.5 15.7,36.5 8.95,37.25 10.45,37.25 11.95,37.25 13.45,37.25 14.95,37.25 8.2,38 9.7,38 11.2,38 12.7,38 14.2,38 15.7,38 8.95,38.75 10.45,38.75 11.95,38.75 13.45,38.75 14.95,38.75 8.2,39.5 9.7,39.5 11.2,39.5 12.7,39.5 14.2,39.5 15.7,39.5 8.95,40.25 10.45,40.25 11.95,40.25 13.45,40.25 14.95,40.25 8.2,41 9.7,41 11.2,41 12.7,41 14.2,41 15.7,41 8.95,41.75 10.45,41.75 11.95,41.75 13.45,41.75 14.95,41.75 8.2,42.5 9.7,42.5 11.2,42.5 12.7,42.5 14.2,42.5 15.7,42.5 8.95,43.25 10.45,43.25 11.95,43.25 13.45,43.25 14.95,43.25 8.2,44 9.7,44 11.2,44 12.7,44 14.2,44 15.7,44
SHB: J4.3 Q2.3 Q5.3 Q8.2 Q11.2 R3.1 R4.2 R8.2 R11.2 | length 10.4
  Top Layer w0.254: R8.2 46,19.9 46.3,19.6 J4.3@54.05,19.6
  other v1: 46.8,24.5 48.3,24.5 49.8,24.5 51.3,24.5 52.8,24.5 54.3,24.5 47.55,25.25 49.05,25.25 50.55,25.25 52.05,25.25 53.55,25.25 46.8,26 48.3,26 49.8,26 51.3,26 52.8,26 54.3,26 47.55,26.75 49.05,26.75 50.55,26.75 52.05,26.75 53.55,26.75 46.8,27.5 48.3,27.5 49.8,27.5 51.3,27.5 52.8,27.5 54.3,27.5 47.55,28.25 49.05,28.25 50.55,28.25 52.05,28.25 53.55,28.25 46.8,29 48.3,29 49.8,29 51.3,29 52.8,29 54.3,29 47.55,29.75 49.05,29.75 50.55,29.75 52.05,29.75 53.55,29.75 46.8,30.5 48.3,30.5 49.8,30.5 51.3,30.5 52.8,30.5 54.3,30.5 47.55,31.25 49.05,31.25 50.55,31.25 52.05,31.25 53.55,31.25 46.8,32 48.3,32 49.8,32 51.3,32 52.8,32 54.3,32 47.55,32.75 49.05,32.75 50.55,32.75 52.05,32.75 53.55,32.75 46.8,33.5 48.3,33.5 49.8,33.5 51.3,33.5 52.8,33.5 54.3,33.5 46.8,35 48.3,35 49.8,35 51.3,35 52.8,35 54.3,35 47.55,35.75 49.05,35.75 50.55,35.75 52.05,35.75 53.55,35.75 46.8,36.5 48.3,36.5 49.8,36.5 51.3,36.5 52.8,36.5 54.3,36.5 47.55,37.25 49.05,37.25 50.55,37.25 52.05,37.25 53.55,37.25 46.8,38 48.3,38 49.8,38 51.3,38 52.8,38 54.3,38 47.55,38.75 49.05,38.75 50.55,38.75 52.05,38.75 53.55,38.75 46.8,39.5 48.3,39.5 49.8,39.5 51.3,39.5 52.8,39.5 54.3,39.5 47.55,40.25 49.05,40.25 50.55,40.25 52.05,40.25 53.55,40.25 46.8,41 48.3,41 49.8,41 51.3,41 52.8,41 54.3,41 47.55,41.75 49.05,41.75 50.55,41.75 52.05,41.75 53.55,41.75 46.8,42.5 48.3,42.5 49.8,42.5 51.3,42.5 52.8,42.5 54.3,42.5 47.55,43.25 49.05,43.25 50.55,43.25 52.05,43.25 53.55,43.25 46.8,44 48.3,44 49.8,44 51.3,44 52.8,44 54.3,44
SHC: J1.4 Q3.3 Q6.3 Q9.2 Q12.2 R5.1 R6.2 R9.2 R12.2
  other v1: 67.2,24.5 68.7,24.5 70.2,24.5 71.7,24.5 73.2,24.5 74.7,24.5 67.95,25.25 69.45,25.25 70.95,25.25 72.45,25.25 73.95,25.25 67.2,26 68.7,26 70.2,26 71.7,26 73.2,26 74.7,26 67.95,26.75 69.45,26.75 70.95,26.75 72.45,26.75 73.95,26.75 67.2,27.5 68.7,27.5 70.2,27.5 71.7,27.5 73.2,27.5 74.7,27.5 67.95,28.25 69.45,28.25 70.95,28.25 72.45,28.25 73.95,28.25 67.2,29 68.7,29 70.2,29 71.7,29 73.2,29 74.7,29 67.95,29.75 69.45,29.75 70.95,29.75 72.45,29.75 73.95,29.75 67.2,30.5 68.7,30.5 70.2,30.5 71.7,30.5 73.2,30.5 74.7,30.5 67.95,31.25 69.45,31.25 70.95,31.25 72.45,31.25 73.95,31.25 67.2,32 68.7,32 70.2,32 71.7,32 73.2,32 74.7,32 67.95,32.75 69.45,32.75 70.95,32.75 72.45,32.75 73.95,32.75 67.2,33.5 68.7,33.5 70.2,33.5 71.7,33.5 73.2,33.5 74.7,33.5 67.2,35 68.7,35 70.2,35 71.7,35 73.2,35 74.7,35 67.95,35.75 69.45,35.75 70.95,35.75 72.45,35.75 73.95,35.75 67.2,36.5 68.7,36.5 70.2,36.5 71.7,36.5 73.2,36.5 74.7,36.5 67.95,37.25 69.45,37.25 70.95,37.25 72.45,37.25 73.95,37.25 67.2,38 68.7,38 70.2,38 71.7,38 73.2,38 74.7,38 67.95,38.75 69.45,38.75 70.95,38.75 72.45,38.75 73.95,38.75 67.2,39.5 68.7,39.5 70.2,39.5 71.7,39.5 73.2,39.5 74.7,39.5 67.95,40.25 69.45,40.25 70.95,40.25 72.45,40.25 73.95,40.25 67.2,41 68.7,41 70.2,41 71.7,41 73.2,41 74.7,41 67.95,41.75 69.45,41.75 70.95,41.75 72.45,41.75 73.95,41.75 67.2,42.5 68.7,42.5 70.2,42.5 71.7,42.5 73.2,42.5 74.7,42.5 67.95,43.25 69.45,43.25 70.95,43.25 72.45,43.25 73.95,43.25 67.2,44 68.7,44 70.2,44 71.7,44 73.2,44 74.7,44
VIN: C1.2 C2.2 C3.2 C4.2 C5.2 C6.2 C7.2 C8.2 C12.2 C13.2 C14.2 D1.1 J3.1 Q1.2 Q2.2 Q3.2 Q4.2 Q5.2 Q6.2 TP4.1 TP5.1 | length 104.9
  Top Layer w0.254: Q2.2@32.79,26.29 Q2.2@33,26.5 ; J3.1@34.15,20.661 J3.1 34.15,24.65 Q2.2@34.5,25
  Top Layer w2: 31.3,25.4 31.3,2.923 32.472,1.751 82.09,1.751 83.262,2.923 83.262,25 83.262,25.75 83.262,26.5 Q3.2@83.262,27.623
  other v1: 22,24.5 23.5,24.5 25,24.5 26.5,24.5 28,24.5 29.5,24.5 33,24.5 34.5,24.5 36,24.5 37.5,24.5 39,24.5 40.5,24.5 81,24.5 82.5,24.5 84,24.5 85.5,24.5 87,24.5 88.5,24.5 22.75,25.25 24.25,25.25 25.75,25.25 27.25,25.25 28.75,25.25 33.75,25.25 35.25,25.25 36.75,25.25 38.25,25.25 39.75,25.25 81.75,25.25 83.25,25.25 84.75,25.25 86.25,25.25 87.75,25.25 22,26 23.5,26 25,26 26.5,26 28,26 29.5,26 33,26 34.5,26 36,26 37.5,26 39,26 40.5,26 81,26 82.5,26 84,26 85.5,26 87,26 88.5,26 22.75,26.75 24.25,26.75 25.75,26.75 27.25,26.75 28.75,26.75 33.75,26.75 35.25,26.75 36.75,26.75 38.25,26.75 39.75,26.75 81.75,26.75 83.25,26.75 84.75,26.75 86.25,26.75 87.75,26.75 22,27.5 23.5,27.5 25,27.5 26.5,27.5 28,27.5 29.5,27.5 33,27.5 34.5,27.5 36,27.5 37.5,27.5 39,27.5 40.5,27.5 81,27.5 82.5,27.5 84,27.5 85.5,27.5 87,27.5 88.5,27.5 22.75,28.25 24.25,28.25 25.75,28.25 27.25,28.25 28.75,28.25 33.75,28.25 35.25,28.25 36.75,28.25 38.25,28.25 39.75,28.25 81.75,28.25 83.25,28.25 84.75,28.25 86.25,28.25 87.75,28.25 22,29 23.5,29 25,29 26.5,29 28,29 29.5,29 33,29 34.5,29 36,29 37.5,29 39,29 40.5,29 81,29 82.5,29 84,29 85.5,29 87,29 88.5,29 22.75,29.75 24.25,29.75 25.75,29.75 27.25,29.75 28.75,29.75 33.75,29.75 35.25,29.75 36.75,29.75 38.25,29.75 39.75,29.75 81.75,29.75 83.25,29.75 84.75,29.75 86.25,29.75 87.75,29.75 22,30.5 23.5,30.5 25,30.5 26.5,30.5 28,30.5 29.5,30.5 33,30.5 34.5,30.5 36,30.5 37.5,30.5 39,30.5 40.5,30.5 81,30.5 82.5,30.5 84,30.5 85.5,30.5 87,30.5 88.5,30.5 22.75,31.25 24.25,31.25 25.75,31.25 27.25,31.25 28.75,31.25 33.75,31.25 35.25,31.25 36.75,31.25 38.25,31.25 39.75,31.25 81.75,31.25 83.25,31.25 84.75,31.25 86.25,31.25 87.75,31.25 22,32 23.5,32 25,32 26.5,32 28,32 29.5,32 33,32 34.5,32 36,32 37.5,32 39,32 40.5,32 81,32 82.5,32 84,32 85.5,32 87,32 88.5,32 22.75,32.75 24.25,32.75 25.75,32.75 27.25,32.75 28.75,32.75 33.75,32.75 35.25,32.75 36.75,32.75 38.25,32.75 39.75,32.75 81.75,32.75 83.25,32.75 84.75,32.75 86.25,32.75 87.75,32.75 22,33.5 23.5,33.5 25,33.5 26.5,33.5 28,33.5 29.5,33.5 33,33.5 34.5,33.5 36,33.5 37.5,33.5 39,33.5 40.5,33.5 81,33.5 82.5,33.5 84,33.5 85.5,33.5 87,33.5 88.5,33.5 22,35 23.5,35 25,35 26.5,35 28,35 29.5,35 33,35 34.5,35 36,35 37.5,35 39,35 40.5,35 81,35 82.5,35 84,35 85.5,35 87,35 88.5,35 22.75,35.75 24.25,35.75 25.75,35.75 27.25,35.75 28.75,35.75 33.75,35.75 35.25,35.75 36.75,35.75 38.25,35.75 39.75,35.75 81.75,35.75 83.25,35.75 84.75,35.75 86.25,35.75 87.75,35.75 22,36.5 23.5,36.5 25,36.5 26.5,36.5 28,36.5 29.5,36.5 33,36.5 34.5,36.5 36,36.5 37.5,36.5 39,36.5 40.5,36.5 81,36.5 82.5,36.5 84,36.5 85.5,36.5 87,36.5 88.5,36.5 22.75,37.25 24.25,37.25 25.75,37.25 27.25,37.25 28.75,37.25 33.75,37.25 35.25,37.25 36.75,37.25 38.25,37.25 39.75,37.25 81.75,37.25 83.25,37.25 84.75,37.25 86.25,37.25 87.75,37.25 22,38 23.5,38 25,38 26.5,38 28,38 29.5,38 33,38 34.5,38 36,38 37.5,38 39,38 40.5,38 81,38 82.5,38 84,38 85.5,38 87,38 88.5,38 22.75,38.75 24.25,38.75 25.75,38.75 27.25,38.75 28.75,38.75 33.75,38.75 35.25,38.75 36.75,38.75 38.25,38.75 39.75,38.75 81.75,38.75 83.25,38.75 84.75,38.75 86.25,38.75 87.75,38.75 22,39.5 23.5,39.5 25,39.5 26.5,39.5 28,39.5 29.5,39.5 33,39.5 34.5,39.5 36,39.5 37.5,39.5 39,39.5 40.5,39.5 81,39.5 82.5,39.5 84,39.5 85.5,39.5 87,39.5 88.5,39.5 22.75,40.25 24.25,40.25 25.75,40.25 27.25,40.25 28.75,40.25 33.75,40.25 35.25,40.25 36.75,40.25 38.25,40.25 39.75,40.25 81.75,40.25 83.25,40.25 84.75,40.25 86.25,40.25 87.75,40.25 22,41 23.5,41 25,41 26.5,41 28,41 29.5,41 33,41 34.5,41 36,41 37.5,41 39,41 40.5,41 81,41 82.5,41 84,41 85.5,41 87,41 88.5,41 22.75,41.75 24.25,41.75 25.75,41.75 27.25,41.75 28.75,41.75 33.75,41.75 35.25,41.75 36.75,41.75 38.25,41.75 39.75,41.75 81.75,41.75 83.25,41.75 84.75,41.75 86.25,41.75 87.75,41.75 22,42.5 23.5,42.5 25,42.5 26.5,42.5 28,42.5 29.5,42.5 33,42.5 34.5,42.5 36,42.5 37.5,42.5 39,42.5 40.5,42.5 81,42.5 82.5,42.5 84,42.5 85.5,42.5 87,42.5 88.5,42.5 22.75,43.25 24.25,43.25 25.75,43.25 27.25,43.25 28.75,43.25 33.75,43.25 35.25,43.25 36.75,43.25 38.25,43.25 39.75,43.25 81.75,43.25 83.25,43.25 84.75,43.25 86.25,43.25 87.75,43.25 22,44 23.5,44 25,44 26.5,44 28,44 29.5,44 33,44 34.5,44 36,44 37.5,44 39,44 40.5,44 81,44 82.5,44 84,44 85.5,44 87,44 88.5,44 24.5,46.3 23.1,46.5 25.9,46.5 22.4,46.8 23.8,46.8 25.2,46.8 26.6,46.8 21.7,47.5 23.1,47.5 24.5,47.5 25.9,47.5 27.3,47.5 21.1,48.2 22.4,48.2 23.8,48.2 25.2,48.2 26.6,48.2 28,48.2 35.8,48.2 37.2,48.2 20.3,48.9 21.7,48.9 23.1,48.9 24.5,48.9 25.9,48.9 27.3,48.9 28.7,48.9 35.1,48.9 36.5,48.9 37.9,48.9 20,49.6 21.1,49.6 22.4,49.6 23.8,49.6 25.2,49.6 26.6,49.6 28,49.6 29,49.6 34.4,49.6 35.8,49.6 37.2,49.6 38.6,49.6 20.3,50.3 21.7,50.3 23.1,50.3 25.9,50.3 27.3,50.3 28.7,50.3 33.7,50.3 35.1,50.3 37.9,50.3 39.3,50.3 19.8,51 21,51 22.4,51 26.6,51 28,51 29.2,51 34.4,51 38.6,51 20.3,51.7 21.7,51.7 23.1,51.7 25.9,51.7 27.3,51.7 28.7,51.7 33.7,51.7 35.1,51.7 37.9,51.7 39.3,51.7 20,52.4 21,52.4 22.4,52.4 23.8,52.4 25.2,52.4 26.6,52.4 28,52.4 29,52.4 34.4,52.4 35.8,52.4 37.2,52.4 38.6,52.4 20.3,53.1 21.7,53.1 23.1,53.1 24.5,53.1 25.9,53.1 27.3,53.1 28.7,53.1 35.1,53.1 36.5,53.1 37.9,53.1 21,53.8 22.4,53.8 23.8,53.8 25.2,53.8 26.6,53.8 28,53.8 35.8,53.8 37.2,53.8 21.7,54.5 23.1,54.5 24.5,54.5 25.9,54.5 27.3,54.5 22.4,55.2 23.8,55.2 25.2,55.2 26.6,55.2 23.1,55.5 25.9,55.5 24.5,55.7
pads on no net: TP6.1 TP7.1 TP8.1 TP9.1

## Polygon pours and split planes (outlines as drawn)
SHC on Top Layer "SHC_L01_P054" (solid, pour order 54): 78.3,44.7 78.3,23.088 81.271,23.088 81.271,20.913 69.5,20.913 69.5,24.287 66.1,24.288 66.1,44.7
SHA on Top Layer "SHA_L01_P010" (solid, pour order 10): 19.3,44.6 19.3,23.2 22.271,23.2 22.271,21.025 10.5,21.025 10.5,24.4 7.1,24.4 7.1,44.6
SHB on Top Layer "SHB_L01_P055" (solid, pour order 55): 43.1,44.5 43.1,23.188 40.129,23.188 40.129,21.013 51.9,21.013 51.9,24.387 55.3,24.388 55.3,44.5
VIN on Top Layer "VIN_L01_P003" (solid, pour order 3): 21.172,24.5 21.172,44.7 41.428,44.7 41.428,24.5
PHA on Top Layer "PHA_L01_P015" (solid, pour order 15): 10.94,17.06 21.932,17.06 cw(c21.932,16.521) 22.471,16.521 22.471,5.34 cw(c21.709,5.34) 21.709,4.578 11.168,4.578 cw(c11.168,5.34) 10.406,5.34 10.406,16.526 cw(c10.94,16.526)
PHB on Top Layer "PHB_L01_P016" (solid, pour order 16): 40.5,17.06 51.461,17.06 cw(c51.461,16.444) 52.076,16.445 52.076,5.418 cw(c51.315,5.418) 51.314,4.656 40.773,4.656 cw(c40.773,5.418) 40.011,5.418 40.011,16.572 cw(c40.5,16.572)
PHC on Top Layer "PHC_L01_P017" (solid, pour order 17): 70,17.06 80.992,17.06 cw(c80.992,16.585) 81.468,16.585 81.468,5.418 cw(c80.706,5.418) 80.705,4.656 70.165,4.656 cw(c70.164,5.418) 69.403,5.418 69.403,16.462 cw(c70,16.462)
PHA on Bottom Layer "PHA_L04_P043" (solid, pour order 43): 10.25,5.094 ccw(c11.344,5.094) 11.344,4 22,4 ccw(c22,5) 23,5 23,15.5 ccw(c22,15.5) 22,16.5 11.44,16.5 11.248,16.5 ccw(c11.248,15.502) 10.25,15.502
PHC on Bottom Layer "PHC_L04_P045" (solid, pour order 45): 80.5,4 ccw(c80.5,5.015) 81.515,5.015 81.515,15.485 ccw(c80.5,15.485) 80.5,16.5 69.765,16.5 ccw(c69.765,15.5) 68.765,15.5 68.765,5 ccw(c69.765,5) 69.765,4
PHB on Bottom Layer "PHB_L04_P044" (solid, pour order 44): 52.5,5 52.5,15.5 ccw(c51.5,15.5) 51.5,16.5 40.5,16.5 ccw(c40.5,15.5) 39.5,15.5 39.5,5 ccw(c40.5,5) 40.5,4 51.5,4 ccw(c51.5,5)
PHA on Layer 1 "PHA_L02_P027" (solid, pour order 27): 23,5 23,15.5 ccw(c22,15.5) 22,16.5 10.234,16.5 10.234,4 22,4 ccw(c22,5)
PHB on Layer 1 "PHB_L02_P031" (solid, pour order 31): 52.5,5 52.5,15.5 ccw(c51.5,15.5) 51.5,16.5 40.5,16.5 ccw(c40.5,15.5) 39.5,15.5 39.5,5 ccw(c40.5,5) 40.5,4 51.5,4 ccw(c51.5,5)
PHC on Layer 1 "PHC_L02_P032" (solid, pour order 32): 81.5,4 81.5,16.5 69.661,16.5 ccw(c69.661,15.5) 68.661,15.5 68.661,5 ccw(c69.661,5) 69.661,4
PHC on Layer 2 "PHC_L03_P037" (solid, pour order 37): 81.5,4 81.5,16.5 69.762,16.5 ccw(c69.761,15.5) 68.762,15.5 68.762,5 ccw(c69.762,5) 69.762,4
PHB on Layer 2 "PHB_L03_P035" (solid, pour order 35): 52.5,5 52.5,15.5 ccw(c51.5,15.5) 51.5,16.5 40.5,16.5 ccw(c40.5,15.5) 39.5,15.5 39.5,5 ccw(c40.5,5) 40.5,4 51.5,4 ccw(c51.5,5)
PHA on Layer 2 "PHA_L03_P034" (solid, pour order 34): 23,5 23,15.5 ccw(c22,15.5) 22,16.5 10.249,16.5 10.249,4 22,4 ccw(c22,5)
no net on Top Solder "NONET_L-01_P-001" (solid): 21.05,44.7 41.35,44.7 41.35,24.4 21.05,24.4

## Keep-outs
Keep-Out Layer:
  the board outline again, w0.025

## Silkscreen, mask and mechanical layers (free items; w line width, h text height)
Top Overlay:
  text "GND" at 75.701,51.65 h1.5
  text "VBAT" at 15.351,51.25 h1.5
  text "REV A" at 2.505,18.941 h1
  text "PS 1/31" at 2.505,17.395 h1
  text "U" at 8.483,7.343 h5
  text "V" at 37.428,6.943 h5
  text "W" at 64.745,6.743 h5
Drill Drawing:
  circle w0.254: c4.321,67.139 r0.701
  lines w0.254: 3.62,69.592 5.022,69.592 5.022,70.994 3.62,70.994 3.62,69.592 ; 3.62,74.148 5.022,74.148 4.321,72.746 3.62,74.148
  lines w0.381: 2.349,65.492 95,65.492 ; 2.349,74.954 95,74.954 ; 10.456,62.337 10.456,78.108 ; 18.55,62.337 18.55,78.108 ; 33.221,62.337 33.221,78.108 ; 39.507,62.337 39.507,78.108 ; 48.658,62.337 48.658,78.108 ; 66.001,62.337 66.001,78.108 ; 73.5,62.337 73.5,78.108 ; 83.296,62.337 83.296,78.108 ; 2.349,62.337 95,62.337 95,78.108 2.349,78.108 2.349,62.337
  text "Symbol" at 4.242,75.9 h1.83
  text "Count" at 11.402,75.9 h1.83
  text "Hole Size" at 19.496,75.9 h1.83
  text "Plated" at 34.168,75.9 h1.83
  text "Hole Type" at 40.453,75.9 h1.83
  text "Drill Layer Pair" at 49.605,75.9 h1.83
  text "Via/Pad" at 66.947,75.9 h1.83
  text "Pad Shape" at 74.446,75.9 h1.83
  text "Template" at 84.242,75.9 h1.83
  text "4" at 11.402,72.746 h1.52
  text "3.200mm (125.98mil)" at 19.496,72.746 h1.52
  text "NPTH" at 34.168,72.746 h1.52
  text "Round" at 40.453,72.746 h1.52
  text "Top Layer - Bottom Layer" at 49.605,72.746 h1.52
  text "Pad" at 66.947,72.746 h1.52
  text "Rounded" at 74.446,72.746 h1.52
  text "c0hn320" at 84.242,72.746 h1.52
  text "7" at 11.402,69.592 h1.52
  text "1.200mm (47.24mil)" at 19.496,69.592 h1.52
  text "PTH" at 34.168,69.592 h1.52
  text "Round" at 40.453,69.592 h1.52
  text "Top Layer - Bottom Layer" at 49.605,69.592 h1.52
  text "Pad" at 66.947,69.592 h1.52
  text "Rounded" at 74.446,69.592 h1.52
  text "(Mixed)" at 84.242,69.592 h1.52
  text "1340" at 11.402,66.438 h1.52
  text "0.400mm (15.75mil)" at 19.496,66.438 h1.52
  text "PTH" at 34.168,66.438 h1.52
  text "Round" at 40.453,66.438 h1.52
  text "Top Layer - Bottom Layer" at 49.605,66.438 h1.52
  text "Via" at 66.947,66.438 h1.52
  text "Rounded" at 74.446,66.438 h1.52
  text "v60h40m0mx0" at 84.242,66.438 h1.52
  text "1351 Total" at 11.402,63.284 h1.52

## Dimensions
86.5,0 to 86.5,60 on Mechanical 1
0,5.5 to 92,5.5 on Mechanical 1

## Text inside footprints (layer, text, board x,y; h text height)
C9: Mechanical 8 "1" at 27.25,13.464 h0.64 r180; Mechanical 8 "2" at 25.85,13.464 h0.64 r180
C10: Mechanical 8 "2" at 35.754,11.3 h0.64 r180; Mechanical 8 "1" at 37.154,11.3 h0.64 r180
C11: Mechanical 8 "2" at 55.954,11.9 h0.64 r180; Mechanical 8 "1" at 57.354,11.9 h0.64 r180
Q1: Mechanical 8 "2" at 25.65,38.738 h0.64 r90; Mechanical 8 "3" at 17.55,39.108 h0.64; Mechanical 8 "1" at 17.65,43.908 h0.64
Q2: Mechanical 8 "2" at 36.85,29.762 h0.64 r270; Mechanical 8 "3" at 44.95,29.392 h0.64 r180; Mechanical 8 "1" at 44.85,24.592 h0.64 r180
Q3: Mechanical 8 "1" at 76.65,33.408 h0.64; Mechanical 8 "3" at 76.55,28.608 h0.64; Mechanical 8 "2" at 84.65,28.238 h0.64 r90
Q4: Mechanical 8 "2" at 25.65,28.238 h0.64 r90; Mechanical 8 "3" at 17.55,28.608 h0.64; Mechanical 8 "1" at 17.65,33.408 h0.64
Q5: Mechanical 8 "1" at 44.85,35.092 h0.64 r180; Mechanical 8 "3" at 44.95,39.892 h0.64 r180; Mechanical 8 "2" at 36.85,40.262 h0.64 r270
Q6: Mechanical 8 "2" at 84.65,38.738 h0.64 r90; Mechanical 8 "3" at 76.55,39.108 h0.64; Mechanical 8 "1" at 76.65,43.908 h0.64
Q7: Mechanical 8 "2" at 11.85,38.738 h0.64 r90; Mechanical 8 "3" at 3.75,39.108 h0.64; Mechanical 8 "1" at 3.85,43.908 h0.64
Q8: Mechanical 8 "1" at 58.65,24.592 h0.64 r180; Mechanical 8 "3" at 58.75,29.392 h0.64 r180; Mechanical 8 "2" at 50.65,29.762 h0.64 r270
Q9: Mechanical 8 "1" at 62.85,33.408 h0.64; Mechanical 8 "3" at 62.75,28.608 h0.64; Mechanical 8 "2" at 70.85,28.238 h0.64 r90
Q10: Mechanical 8 "1" at 3.85,33.408 h0.64; Mechanical 8 "3" at 3.75,28.608 h0.64; Mechanical 8 "2" at 11.85,28.238 h0.64 r90
Q11: Mechanical 8 "2" at 50.65,40.262 h0.64 r270; Mechanical 8 "3" at 58.75,39.892 h0.64 r180; Mechanical 8 "1" at 58.65,35.092 h0.64 r180
Q12: Mechanical 8 "1" at 62.85,43.908 h0.64; Mechanical 8 "3" at 62.75,39.108 h0.64; Mechanical 8 "2" at 70.85,38.738 h0.64 r90
R1: Mechanical 8 "1" at 24.508,22.6 h0.64; Mechanical 8 "2" at 26.108,22.6 h0.64
R3: Mechanical 8 "2" at 36.392,22.9 h0.64 r180; Mechanical 8 "1" at 37.992,22.9 h0.64 r180
R5: Mechanical 8 "2" at 66.142,23.5 h0.64 r180; Mechanical 8 "1" at 67.742,23.5 h0.64 r180
R13: Mechanical 8 "2" at 6.108,22.9 h0.64; Mechanical 8 "1" at 4.508,22.9 h0.64
R14: Mechanical 8 "2" at 57.608,22.7 h0.64; Mechanical 8 "1" at 56.008,22.7 h0.64
R15: Mechanical 8 "2" at 63.708,22.5 h0.64; Mechanical 8 "1" at 62.108,22.5 h0.64
R16: Mechanical 8 "1" at 26.184,11.749 h0.64; Mechanical 8 "2" at 27.784,11.749 h0.64
R17: Mechanical 8 "2" at 37.791,14.088 h0.64; Mechanical 8 "1" at 36.191,14.088 h0.64
R18: Mechanical 8 "2" at 57.891,14.488 h0.64; Mechanical 8 "1" at 56.291,14.488 h0.64
RT1: Mechanical 8 "1" at 26.184,14.694 h0.64; Mechanical 8 "2" at 27.784,14.694 h0.64
RT2: Mechanical 8 "2" at 37.808,12.6 h0.64; Mechanical 8 "1" at 36.208,12.6 h0.64
RT3: Mechanical 8 "2" at 57.908,13.1 h0.64; Mechanical 8 "1" at 56.308,13.1 h0.64
TP1: Mechanical 8 "1" at 14.722,9.5 h0.64
TP2: Mechanical 8 "1" at 44.222,9.5 h0.64
TP3: Mechanical 8 "1" at 73.722,9.5 h0.64
TP4: Mechanical 8 "1" at 34.722,51 h0.64
TP5: Mechanical 8 "1" at 22.722,51 h0.64
TP10: Mechanical 8 "1" at 65.722,51 h0.64
TP11: Mechanical 8 "1" at 53.722,51 h0.64